# Altium PCB ISO-ASS[3]-VB-RC1.PcbDoc (part 1 of 3)
Units mm, origin at the board's own origin, x right, y up, seen from the top; angles counter-clockwise.
Board outline 300 x 85 mm, 4 copper layers (Top Layer, MidLayer1, MidLayer2, Bottom Layer); 157 components, 49 nets, 745 pads, 270 vias.
Unrouted connection lines stored in the file: 15.
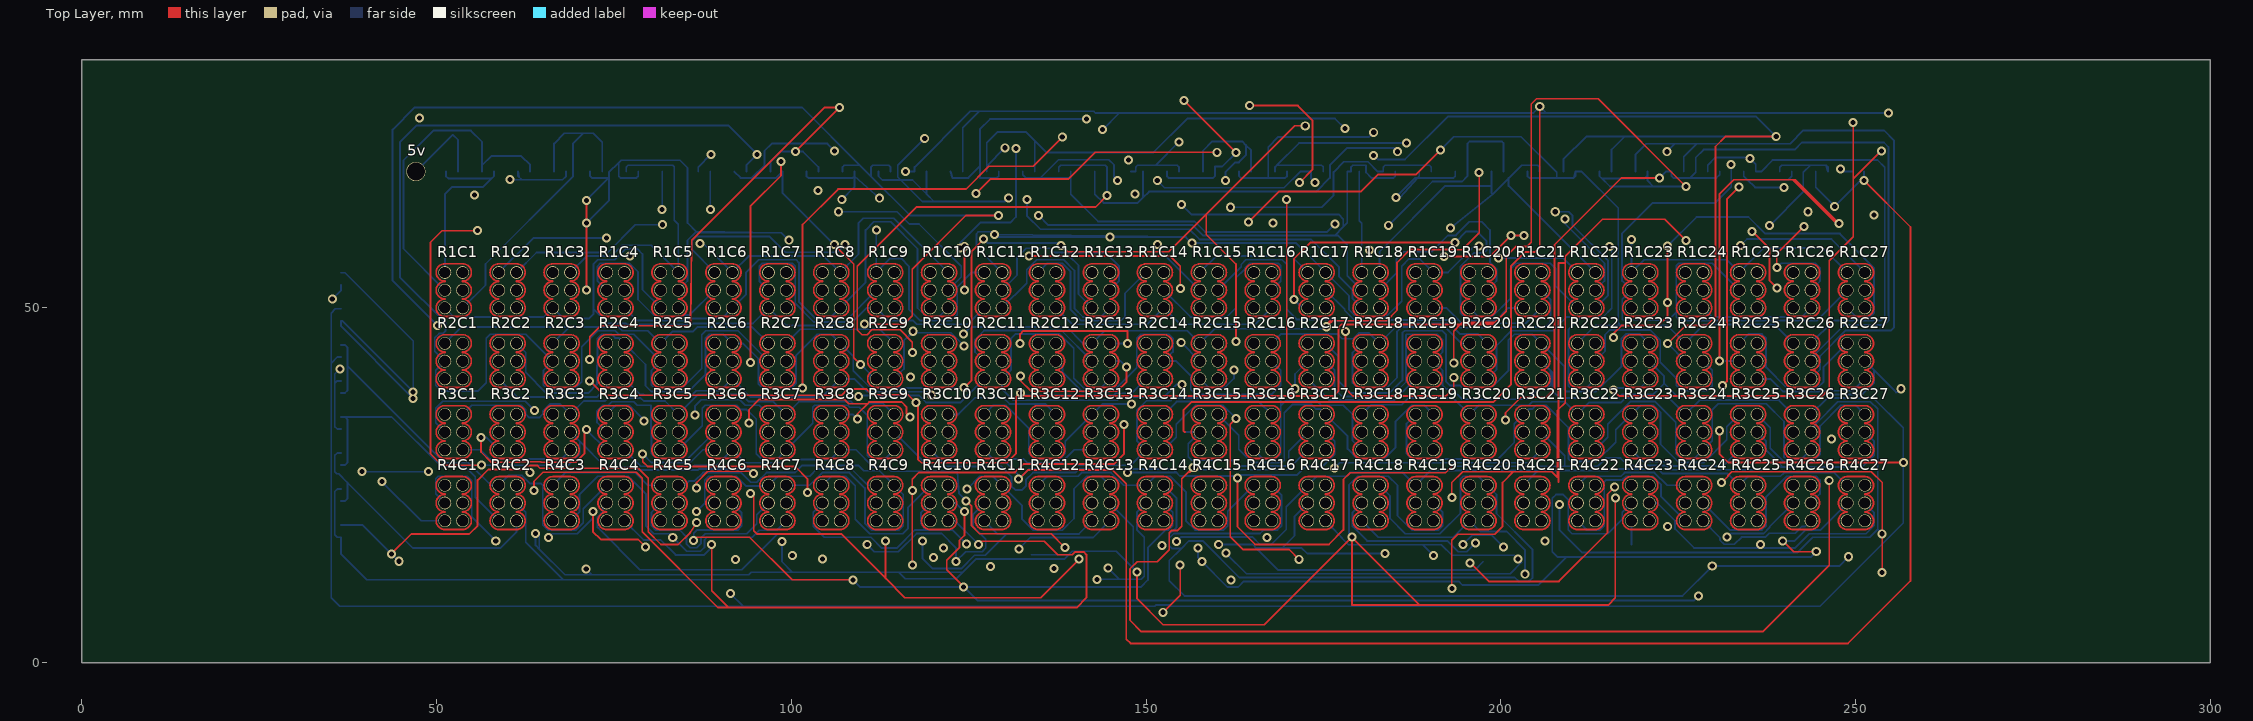
[diagram p0: Top Layer view]
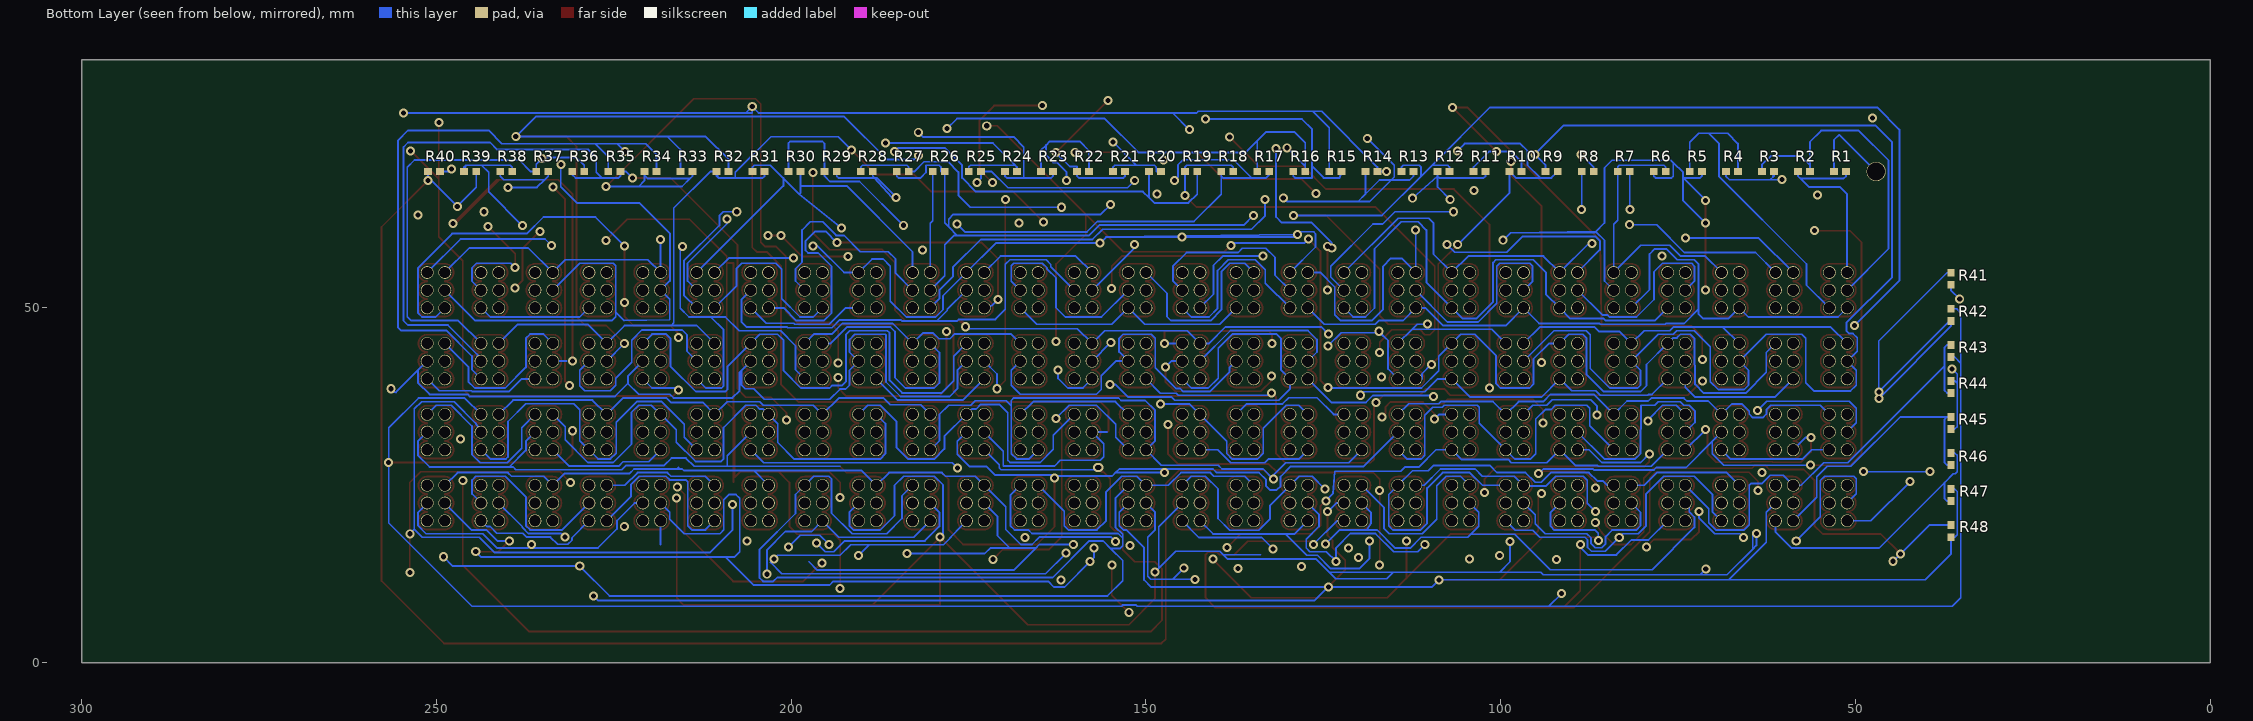
[diagram p1: Bottom Layer view, seen from below]
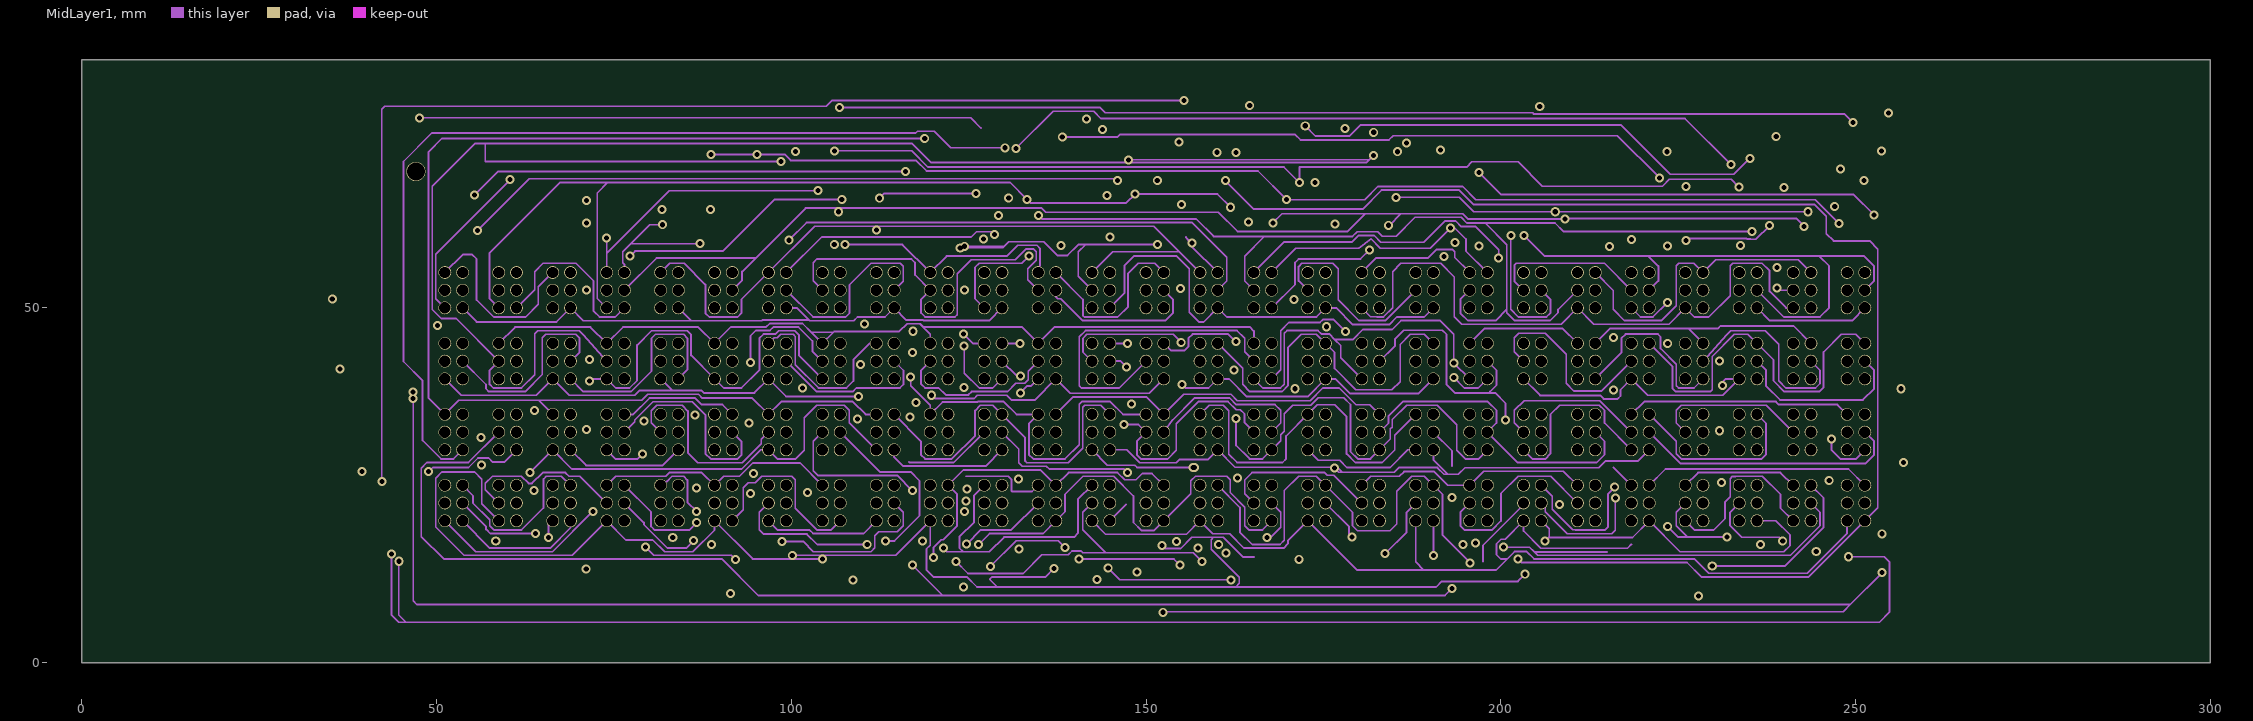
[diagram p2: MidLayer1]
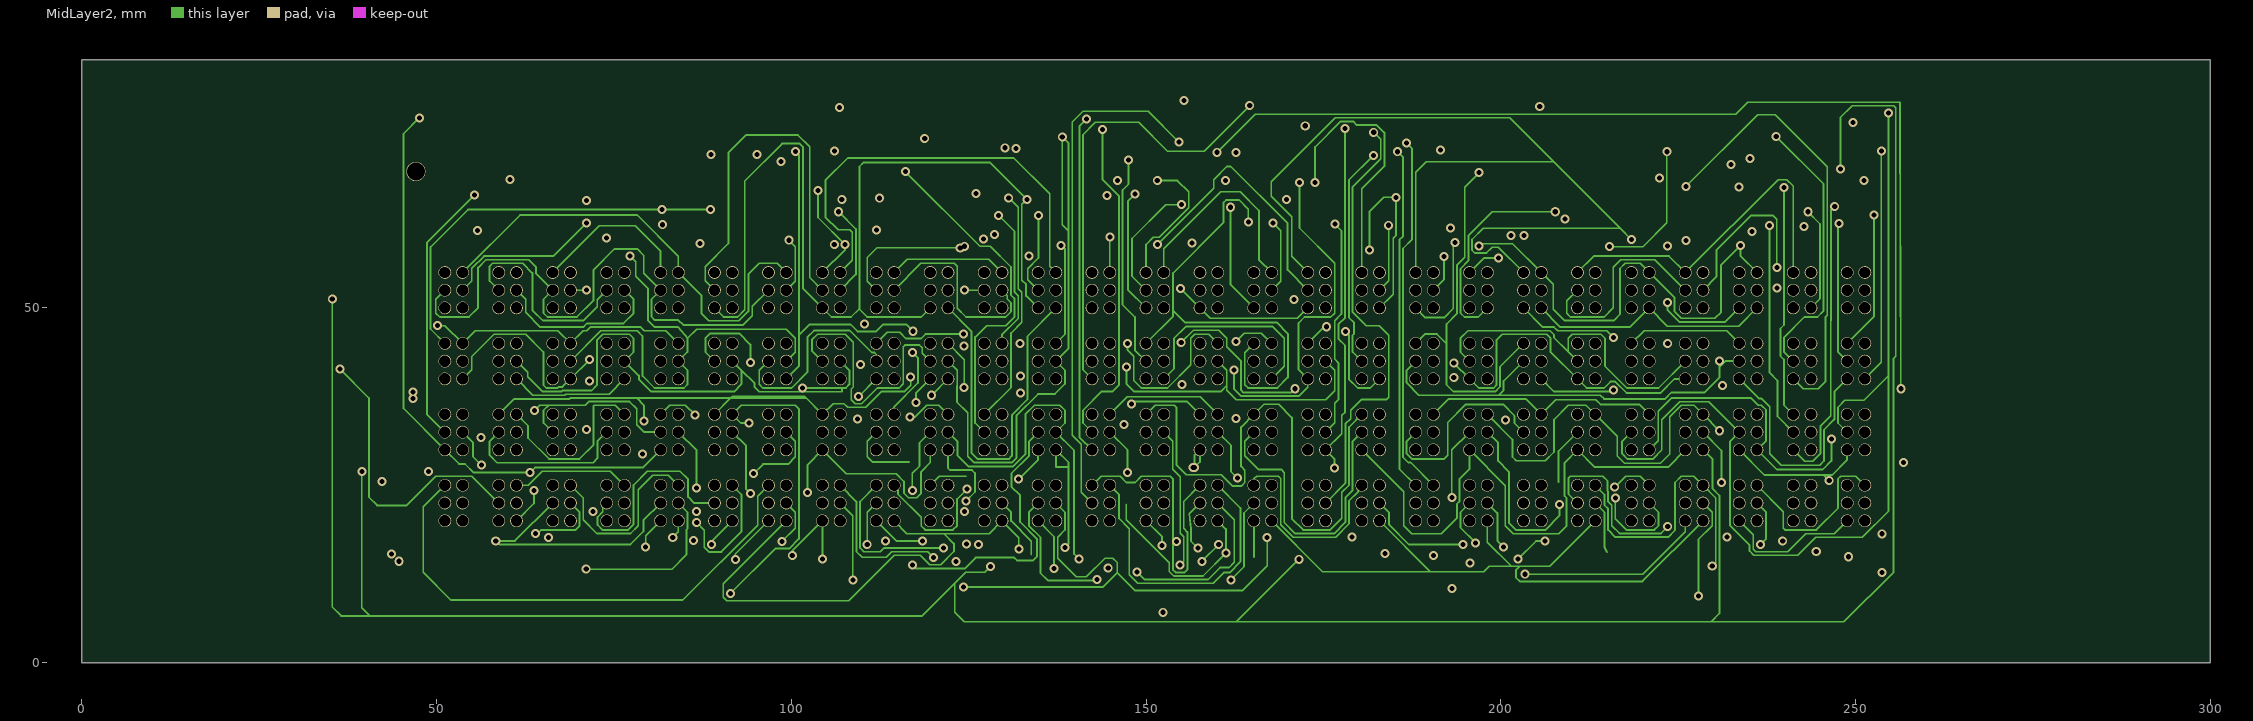
[diagram p3: MidLayer2]

## Layer stack, top to bottom
Top Layer: signal copper 0.0356
Dielectric: prepreg 0.32, FR-4, Dk 4.8
MidLayer1: signal copper 0.0356
Dielectric: core 0.32, FR-4, Dk 4.8
MidLayer2: signal copper 0.0356
Dielectric: prepreg 0.32, FR-4, Dk 4.8
Bottom Layer: signal copper 0.0356

## Board outline
0,0 300,0 300,85 0,85 0,0

## Design rules (kind name [scope] priority, off if disabled: settings)
Clearance [All] p1: gap=0.254
PolygonConnect [All] p1: connectstyle=Relief reliefconductorwidth=0.254 reliefentries=4 polygonreliefangle="90 Angle"
RoutingVias [All] p1: holewidth=0.711 width=1.27 viastyle="Through Hole" minholewidth=0.711 minwidth=1.27 maxholewidth=0.711 maxwidth=1.27
SilkscreenOverComponentPads [All] p1: minsilkscreentomaskgap=0.254
SolderMaskExpansion [All] p1: expansion=0.102
TestPointUsage [All] p1: valid=0 allowmultiple=FALSE
Testpoint [All] p1: side=15 testpointundercomponent=TRUE minsize=1.016 maxsize=2.54 preferedsize=1.524 minholesize=0 maxholesize=1.016 preferedholesize=0.813 testpointgrid=0.025 style=1023 order=0123456789
Width [All] p1: maxlimit=0.254 minlimit=0.254 preferedwidth=0.254
23 further rules are at their usual default settings.

## Components (designator, comment, footprint, x,y, rotation, side; value= is the part's Value field where it differs from the comment)
5v "5v" 5v 47.117,69.215 r180 top
R1 "ERA3Y" ERA-0603 52.197,69.215 r0 bottom
R1C1 "BC-ASS[3]" BC-ASS[3] 51.2,50 r0 top
R1C2 "BC-ASS[3]" BC-ASS[3] 58.8,50 r0 top
R1C3 "BC-ASS[3]" BC-ASS[3] 66.4,50 r0 top
R1C4 "BC-ASS[3]" BC-ASS[3] 74,50 r0 top
R1C5 "BC-ASS[3]" BC-ASS[3] 81.6,50 r0 top
R1C6 "BC-ASS[3]" BC-ASS[3] 89.2,50 r0 top
R1C7 "BC-ASS[3]" BC-ASS[3] 96.8,50 r0 top
R1C8 "BC-ASS[3]" BC-ASS[3] 104.4,50 r0 top
R1C9 "BC-ASS[3]" BC-ASS[3] 112,50 r0 top
R1C10 "BC-ASS[3]" BC-ASS[3] 119.6,50 r0 top
R1C11 "BC-ASS[3]" BC-ASS[3] 127.2,50 r0 top
R1C12 "BC-ASS[3]" BC-ASS[3] 134.8,50 r0 top
R1C13 "BC-ASS[3]" BC-ASS[3] 142.4,50 r0 top
R1C14 "BC-ASS[3]" BC-ASS[3] 150,50 r0 top
R1C15 "BC-ASS[3]" BC-ASS[3] 157.6,50 r0 top
R1C16 "BC-ASS[3]" BC-ASS[3] 165.2,50 r0 top
R1C17 "BC-ASS[3]" BC-ASS[3] 172.8,50 r0 top
R1C18 "BC-ASS[3]" BC-ASS[3] 180.4,50 r0 top
R1C19 "BC-ASS[3]" BC-ASS[3] 188,50 r0 top
R1C20 "BC-ASS[3]" BC-ASS[3] 195.6,50 r0 top
R1C21 "BC-ASS[3]" BC-ASS[3] 203.2,50 r0 top
R1C22 "BC-ASS[3]" BC-ASS[3] 210.8,50 r0 top
R1C23 "BC-ASS[3]" BC-ASS[3] 218.4,50 r0 top
R1C24 "BC-ASS[3]" BC-ASS[3] 226,50 r0 top
R1C25 "BC-ASS[3]" BC-ASS[3] 233.6,50 r0 top
R1C26 "BC-ASS[3]" BC-ASS[3] 241.2,50 r0 top
R1C27 "BC-ASS[3]" BC-ASS[3] 248.8,50 r0 top
R2 "ERA3Y" ERA-0603 57.277,69.215 r180 bottom
R2C1 "BC-ASS[3]" BC-ASS[3] 51.2,40 r0 top
R2C2 "BC-ASS[3]" BC-ASS[3] 58.8,40 r0 top
R2C3 "BC-ASS[3]" BC-ASS[3] 66.4,40 r0 top
R2C4 "BC-ASS[3]" BC-ASS[3] 74,40 r0 top
R2C5 "BC-ASS[3]" BC-ASS[3] 81.6,40 r0 top
R2C6 "BC-ASS[3]" BC-ASS[3] 89.2,40 r0 top
R2C7 "BC-ASS[3]" BC-ASS[3] 96.8,40 r0 top
R2C8 "BC-ASS[3]" BC-ASS[3] 104.4,40 r0 top
R2C9 "BC-ASS[3]" BC-ASS[3] 112,40 r0 top
R2C10 "BC-ASS[3]" BC-ASS[3] 119.6,40 r0 top
R2C11 "BC-ASS[3]" BC-ASS[3] 127.2,40 r0 top
R2C12 "BC-ASS[3]" BC-ASS[3] 134.8,40 r0 top
R2C13 "BC-ASS[3]" BC-ASS[3] 142.4,40 r0 top
R2C14 "BC-ASS[3]" BC-ASS[3] 150,40 r0 top
R2C15 "BC-ASS[3]" BC-ASS[3] 157.6,40 r0 top
R2C16 "BC-ASS[3]" BC-ASS[3] 165.2,40 r0 top
R2C17 "BC-ASS[3]" BC-ASS[3] 172.8,40 r0 top
R2C18 "BC-ASS[3]" BC-ASS[3] 180.4,40 r0 top
R2C19 "BC-ASS[3]" BC-ASS[3] 188,40 r0 top
R2C20 "BC-ASS[3]" BC-ASS[3] 195.6,40 r0 top
R2C21 "BC-ASS[3]" BC-ASS[3] 203.2,40 r0 top
R2C22 "BC-ASS[3]" BC-ASS[3] 210.8,40 r0 top
R2C23 "BC-ASS[3]" BC-ASS[3] 218.4,40 r0 top
R2C24 "BC-ASS[3]" BC-ASS[3] 226,40 r0 top
R2C25 "BC-ASS[3]" BC-ASS[3] 233.6,40 r0 top
R2C26 "BC-ASS[3]" BC-ASS[3] 241.2,40 r0 top
R2C27 "BC-ASS[3]" BC-ASS[3] 248.8,40 r0 top
R3 "ERA3Y" ERA-0603 62.357,69.215 r0 bottom
R3C1 "BC-ASS[3]" BC-ASS[3] 51.2,30 r0 top
R3C2 "BC-ASS[3]" BC-ASS[3] 58.8,30 r0 top
R3C3 "BC-ASS[3]" BC-ASS[3] 66.4,30 r0 top
R3C4 "BC-ASS[3]" BC-ASS[3] 74,30 r0 top
R3C5 "BC-ASS[3]" BC-ASS[3] 81.6,30 r0 top
R3C6 "BC-ASS[3]" BC-ASS[3] 89.2,30 r0 top
R3C7 "BC-ASS[3]" BC-ASS[3] 96.8,30 r0 top
R3C8 "BC-ASS[3]" BC-ASS[3] 104.4,30 r0 top
R3C9 "BC-ASS[3]" BC-ASS[3] 112,30 r0 top
R3C10 "BC-ASS[3]" BC-ASS[3] 119.6,30 r0 top
R3C11 "BC-ASS[3]" BC-ASS[3] 127.2,30 r0 top
R3C12 "BC-ASS[3]" BC-ASS[3] 134.8,30 r0 top
R3C13 "BC-ASS[3]" BC-ASS[3] 142.4,30 r0 top
R3C14 "BC-ASS[3]" BC-ASS[3] 150,30 r0 top
R3C15 "BC-ASS[3]" BC-ASS[3] 157.6,30 r0 top
R3C16 "BC-ASS[3]" BC-ASS[3] 165.2,30 r0 top
R3C17 "BC-ASS[3]" BC-ASS[3] 172.8,30 r0 top
R3C18 "BC-ASS[3]" BC-ASS[3] 180.4,30 r0 top
R3C19 "BC-ASS[3]" BC-ASS[3] 188,30 r0 top
R3C20 "BC-ASS[3]" BC-ASS[3] 195.6,30 r0 top
R3C21 "BC-ASS[3]" BC-ASS[3] 203.2,30 r0 top
R3C22 "BC-ASS[3]" BC-ASS[3] 210.8,30 r0 top
R3C23 "BC-ASS[3]" BC-ASS[3] 218.4,30 r0 top
R3C24 "BC-ASS[3]" BC-ASS[3] 226,30 r0 top
R3C25 "BC-ASS[3]" BC-ASS[3] 233.6,30 r0 top
R3C26 "BC-ASS[3]" BC-ASS[3] 241.2,30 r0 top
R3C27 "BC-ASS[3]" BC-ASS[3] 248.8,30 r0 top
R4 "ERA3Y" ERA-0603 67.437,69.215 r180 bottom
R4C1 "BC-ASS[3]" BC-ASS[3] 51.2,20 r0 top
R4C2 "BC-ASS[3]" BC-ASS[3] 58.8,20 r0 top
R4C3 "BC-ASS[3]" BC-ASS[3] 66.4,20 r0 top
R4C4 "BC-ASS[3]" BC-ASS[3] 74,20 r0 top
R4C5 "BC-ASS[3]" BC-ASS[3] 81.6,20 r0 top
R4C6 "BC-ASS[3]" BC-ASS[3] 89.2,20 r0 top
R4C7 "BC-ASS[3]" BC-ASS[3] 96.8,20 r0 top
R4C8 "BC-ASS[3]" BC-ASS[3] 104.4,20 r0 top
R4C9 "BC-ASS[3]" BC-ASS[3] 112,20 r0 top
R4C10 "BC-ASS[3]" BC-ASS[3] 119.6,20 r0 top
R4C11 "BC-ASS[3]" BC-ASS[3] 127.2,20 r0 top
R4C12 "BC-ASS[3]" BC-ASS[3] 134.8,20 r0 top
R4C13 "BC-ASS[3]" BC-ASS[3] 142.4,20 r0 top
R4C14 "BC-ASS[3]" BC-ASS[3] 150,20 r0 top
R4C15 "BC-ASS[3]" BC-ASS[3] 157.6,20 r0 top
R4C16 "BC-ASS[3]" BC-ASS[3] 165.2,20 r0 top
R4C17 "BC-ASS[3]" BC-ASS[3] 172.8,20 r0 top
R4C18 "BC-ASS[3]" BC-ASS[3] 180.4,20 r0 top
R4C19 "BC-ASS[3]" BC-ASS[3] 188,20 r0 top
R4C20 "BC-ASS[3]" BC-ASS[3] 195.6,20 r0 top
R4C21 "BC-ASS[3]" BC-ASS[3] 203.2,20 r0 top
R4C22 "BC-ASS[3]" BC-ASS[3] 210.8,20 r0 top
R4C23 "BC-ASS[3]" BC-ASS[3] 218.4,20 r0 top
R4C24 "BC-ASS[3]" BC-ASS[3] 226,20 r0 top
R4C25 "BC-ASS[3]" BC-ASS[3] 233.6,20 r0 top
R4C26 "BC-ASS[3]" BC-ASS[3] 241.2,20 r0 top
R4C27 "BC-ASS[3]" BC-ASS[3] 248.8,20 r0 top
R5 "ERA3Y" ERA-0603 72.517,69.215 r0 bottom
R6 "ERA3Y" ERA-0603 77.597,69.215 r180 bottom
R7 "ERA3Y" ERA-0603 82.677,69.215 r0 bottom
R8 "ERA3Y" ERA-0603 87.757,69.215 r180 bottom
R9 "ERA3Y" ERA-0603 92.837,69.215 r0 bottom
R10 "ERA3Y" ERA-0603 97.917,69.215 r180 bottom
R11 "ERA3Y" ERA-0603 102.997,69.215 r0 bottom
R12 "ERA3Y" ERA-0603 108.077,69.215 r180 bottom
R13 "ERA3Y" ERA-0603 113.157,69.215 r0 bottom
R14 "ERA3Y" ERA-0603 118.237,69.215 r180 bottom
R15 "ERA3Y" ERA-0603 123.317,69.215 r0 bottom
R16 "ERA3Y" ERA-0603 128.397,69.215 r180 bottom
R17 "ERA3Y" ERA-0603 133.477,69.215 r0 bottom
R18 "ERA3Y" ERA-0603 138.557,69.215 r180 bottom
R19 "ERA3Y" ERA-0603 143.637,69.215 r0 bottom
R20 "ERA3Y" ERA-0603 148.717,69.215 r180 bottom
R21 "ERA3Y" ERA-0603 153.797,69.215 r0 bottom
R22 "ERA3Y" ERA-0603 158.877,69.215 r180 bottom
R23 "ERA3Y" ERA-0603 163.957,69.215 r0 bottom
R24 "ERA3Y" ERA-0603 169.037,69.215 r180 bottom
R25 "ERA3Y" ERA-0603 174.117,69.215 r0 bottom
R26 "ERA3Y" ERA-0603 179.197,69.215 r180 bottom
R27 "ERA3Y" ERA-0603 184.277,69.215 r0 bottom
R28 "ERA3Y" ERA-0603 189.357,69.215 r0 bottom
R29 "ERA3Y" ERA-0603 194.437,69.215 r180 bottom
R30 "ERA3Y" ERA-0603 199.517,69.215 r0 bottom
R31 "ERA3Y" ERA-0603 204.597,69.215 r0 bottom
R32 "ERA3Y" ERA-0603 209.677,69.215 r0 bottom
R33 "ERA3Y" ERA-0603 214.757,69.215 r0 bottom
R34 "ERA3Y" ERA-0603 219.837,69.215 r0 bottom
R35 "ERA3Y" ERA-0603 224.917,69.215 r0 bottom
R36 "ERA3Y" ERA-0603 229.997,69.215 r0 bottom
R37 "ERA3Y" ERA-0603 235.077,69.215 r0 bottom
R38 "ERA3Y" ERA-0603 240.157,69.215 r0 bottom
R39 "ERA3Y" ERA-0603 245.237,69.215 r0 bottom
R40 "ERA3Y" ERA-0603 250.317,69.215 r0 bottom
R41 "ERA3Y" ERA-0603 36.576,54.102 r270 bottom
R42 "ERA3Y" ERA-0603 36.576,49.022 r270 bottom
R43 "ERA3Y" ERA-0603 36.576,43.942 r270 bottom
R44 "ERA3Y" ERA-0603 36.576,38.862 r270 bottom
R45 "ERA3Y" ERA-0603 36.576,33.782 r270 bottom
R46 "ERA3Y" ERA-0603 36.576,28.702 r270 bottom
R47 "ERA3Y" ERA-0603 36.576,23.622 r270 bottom
R48 "ERA3Y" ERA-0603 36.576,18.542 r270 bottom

## Footprints (in the part's own frame and the unit in brackets; to place one, negate y for a bottom-side part, rotate by r counter-clockwise, add the part's x,y. Pads: shape width x height; smd on the part's side, far side on the other; paste and mask are expansions set on the pad)
5v [mm]
  round 2.7 hole 2.5: 0(0,0)
BC-ASS[3] [mm] "American Standard Sign [3]"
  round 1.8 hole 1.6: 1(0,5) 2(0,2.5) 3(0,0) 4(2.5,5) 5(2.5,2.5) 6(2.5,0)
  Top Layer lines w0.254: 0,1.223 ccw(c0,0) 0,-1.223 2.5,-1.223 ccw(c2.5,0) 2.5,1.223 ; 0,1.277 cw(c0,2.5) 0,3.723 ; 0,3.777 cw(c0,5) 0,6.223 2.5,6.223 cw(c2.5,5) 2.5,3.777 ; 2.5,1.277 ccw(c2.5,2.5) 2.5,3.723
ERA-0603 [mm] "Chip Resistor; Body 1.6 x 0.8 mm (LxW typ)"
  rect 1.1x1 smd: 1(-0.85,0) 2(0.85,0)

## Part data
R1 R2 R3 R4 R5 R6 R7 R8 R9 R10 R11 R12 R13 R14 R15 R16 R17 R18 R19 R20 R21 R22 R23 R24 R25 R26 R27 R28 R29 R30 R31 R32 R33 R34 R35 R36 R37 R38 R39 R40 R41 R42 R43 R44 R45 R46 R47 R48: "Rectangular Thick Film Chip Resistor, 10 Ohm to 330k Ohm Range, 0.1% and 0.5% Tolerance, 0603 Size, 0.063 W"

## Via types
v1: diameter 1.27, hole 0.711, Top Layer to Bottom Layer, 270 vias

## Nets (pads, with @x,y where several pads share a name; then routed paths per layer and width w, separated by ;. In a path a pad name is that pad's centre, name@x,y a point inside that pad or via, vN(x,y) a via of type N, cw(c..) or ccw(c..) an arc to the next point about the centre after c; other vN are vias at no path point)
Net5v_0: 5v.0 R1.2 | length 12.9
  Bottom Layer w0.254: 5v.0@47.117,69.215 52.312,74.41 52.324,74.41 53.047,73.687 R1.2@53.047,69.215
NetR1_1: R1.1 R1C1.1 R1C3.1 R1C5.1 R1C7.1 R1C9.1 R1C11.1 R1C13.1 R1C15.1 R1C17.1 R1C19.1 R1C21.1 R1C23.1 R1C25.1 R1C27.1 R2.1 | length 468
  MidLayer1 w0.254: R1C1.1@51.2,55 53.706,57.506 55.067,57.506 55.677,56.896 55.677,51.118 58.078,48.717 62.586,48.717 64.364,50.495 64.364,52.964 R1C3.1@66.4,55 ; R1C5.1@81.6,55 82.886,56.286 84.912,56.286 87.909,53.289 87.909,49.276 88.468,48.717 92.456,48.717 92.989,49.251 92.989,51.189 R1C7.1@96.8,55 103.319,61.519 112,61.519 112.508,61.519 ; v1(112,61.011) 112.508,61.519 ; R1C13.1@142.4,55 145.312,57.912 154.688,57.912 ; R1C15.1@157.6,55 154.688,57.912 ; 112.508,61.519 151.081,61.519 ; 112.508,61.519 151.081,61.519 ; 151.081,61.519 154.688,57.912
  MidLayer2 w0.254: R1C3.1@66.4,55 72.97,61.57 78.029,61.57 81.6,57.998 R1C5.1@81.6,55 ; R1C17.1@172.8,55 170.545,57.255 170.545,62.83 167.64,65.735 167.64,67.767 176.657,76.784 201.255,76.784 207.453,70.587 ; R1C19.1@188,55 188,59.095 188.011,59.106 188.011,69.099 189.499,70.587 207.453,70.587 ; R1C21.1@203.2,55 199.653,58.547 198.78,58.547 197.968,57.734 196.342,57.734 195.936,58.141 195.936,59.639 197.51,61.214 216.825,61.214 ; v1(218.4,59.639) 216.825,61.214 ; 207.453,70.587 216.825,61.214 ; 207.453,70.587 216.825,61.214
  Bottom Layer w0.254: R1C1.1@51.2,55 51.2,66.04 52.216,67.056 56.603,67.056 57.797,68.25 ; R1.1@51.347,69.215 51.347,68.566 51.664,68.25 57.797,68.25 ; R2.1@58.127,69.215 58.127,68.58 ; v1(112,61.011) R1C9.1@112,55 113.972,56.972 115.494,56.972 116.586,55.88 116.586,49.837 118.212,48.211 122.582,48.211 123.393,49.022 123.393,52.946 125.447,55 R1C11.1@127.2,55 ; R1C15.1@157.6,55 159.897,57.297 170.503,57.297 R1C17.1@172.8,55 ; v1(218.4,59.639) R1C23.1@218.4,55 220.19,56.791 231.809,56.791 R1C25.1@233.6,55 237.045,58.445 245.355,58.445 R1C27.1@248.8,55 ; 57.797,68.25 58.127,68.58 ; 57.797,68.25 58.127,68.58
NetR1C1_2: R1C1.2 R1C3.2 R1C5.2 R1C7.2 R1C9.2 R1C11.2 R1C13.2 R1C15.2 R1C17.2 R1C19.2 R1C21.2 R1C23.2 R1C25.2 R1C27.2 R2.2 R3.2 | length 558.6
  Top Layer w0.254: v1(124.409,52.5) 124.409,58.471 v1(124.409,58.688)
  MidLayer1 w0.254: v1(123.825,58.471) 124.409,58.471 129.825,58.471 130.043,58.688 ; v1(124.409,58.688) 130.043,58.688 ; v1(131.674,72.466) 136.931,77.724 142.621,77.724 143.662,76.683 225.958,76.683 v1(232.461,70.18) ; R1C13.2@142.4,52.5 140.462,54.438 140.462,57.912 141.478,58.928 ; R1C17.2@172.8,52.5 171.501,53.799 171.501,55.829 171.958,56.286 176.327,56.286 177.089,55.524 177.089,51.13 180.01,48.209 183.709,48.209 R1C19.2@188,52.5 ; R1C21.2@203.2,52.5 201.919,53.781 201.919,56.021 202.184,56.286 214.614,56.286 R1C23.2@218.4,52.5 ; 130.043,58.688 130.689,59.334 ; 130.043,58.688 130.689,59.334 ; 130.689,59.334 135.566,59.334 137.496,57.404 138.938,57.404 140.462,58.928 141.478,58.928 ; 141.478,58.928 v1(151.613,58.928) 141.478,58.928
  MidLayer2 w0.254: R1C1.2@51.2,52.5 49.919,51.219 49.919,49.276 50.478,48.717 54.585,48.717 55.88,50.013 55.88,55.677 56.998,56.794 62.992,56.794 64.059,55.728 64.059,54.841 R1C3.2@66.4,52.5 65.1,51.2 65.1,49.276 65.657,48.719 69.801,48.719 72.161,51.079 72.161,55.372 75.108,58.318 78.3,58.318 79.236,57.382 79.236,54.864 R1C5.2@81.6,52.5 80.315,51.215 80.315,48.768 80.796,48.287 84.095,48.287 84.778,47.604 93.247,47.604 94.526,48.882 94.526,50.226 R1C7.2@96.8,52.5 ; R1C9.2@112,52.5 110.719,53.781 110.719,57.099 112.09,58.471 v1(123.825,58.471) ; v1(124.409,52.5) R1C11.2@127.2,52.5 ; v1(151.613,58.928) 159.537,66.853 159.537,68.072 161.392,69.926 161.95,69.926 169.951,61.925 169.951,55.349 R1C17.2@172.8,52.5
  Bottom Layer w0.254: R1C1.2@51.2,52.5 45.364,58.336 45.364,70.79 49.555,74.981 54.864,74.981 56.427,73.418 56.427,70.104 ; R3.2@63.207,69.215 63.207,70.168 61.976,71.399 57.722,71.399 56.427,70.104 ; R1C7.2@96.8,52.5 95.519,53.781 95.519,55.88 95.92,56.281 100.18,56.281 100.581,55.88 100.581,50.647 103.209,48.02 107.52,48.02 R1C9.2@112,52.5 ; v1(123.825,58.471) 123.825,58.688 123.825,59.196 126.655,62.027 130.886,62.027 131.674,62.814 v1(131.674,72.466) ; v1(151.613,58.928) 151.613,58.487 R1C15.2@157.6,52.5 ; v1(232.461,70.18) 232.461,67.056 230.175,64.77 221.336,64.77 217.094,60.528 217.094,53.806 R1C23.2@218.4,52.5 217.119,51.219 217.119,48.336 223.52,48.209 224.714,49.403 ; R1C25.2@233.6,52.5 229.819,56.281 225.044,56.281 224.714,55.951 ; R1C27.2@248.8,52.5 244.509,48.209 225.273,48.209 224.714,48.768 224.714,49.403 ; 56.427,70.104 R2.2@56.427,69.215 56.427,70.104 ; 224.714,49.403 224.714,55.951 ; 224.714,49.403 224.714,55.951
NetR1C1_3: R1C1.3 R1C3.3 R1C5.3 R1C7.3 R1C9.3 R1C11.3 R1C13.3 R1C15.3 R1C17.3 R1C19.3 R1C21.3 R1C23.3 R1C25.3 R1C27.3 R3.1 R4.1 | length 409.1
  Top Layer w0.254: v1(133.528,57.302) 153.416,57.302 154.838,55.88 v1(154.838,52.762) ; v1(170.84,51.206) 170.84,56.896 173.152,59.207 v1(193.573,59.207) ; v1(215.849,45.847) 215.849,46.355 217.018,47.523 222.225,47.523 223.469,48.768 v1(223.469,50.749) ; v1(223.469,50.749) v1(223.469,58.699) v1(223.469,50.749)
  MidLayer1 w0.254: R1C1.3@51.2,50 49.919,51.281 49.919,57.59 v1(60.401,68.072) ; R1C11.3@127.2,50 125.908,51.292 125.908,55.702 126.492,56.286 132.512,56.286 v1(133.528,57.302) ; R1C23.3@218.4,50 219.683,48.717 221.437,48.717 v1(223.469,50.749)
  MidLayer2 w0.254: v1(154.838,52.762) R1C15.3@157.6,50 159.061,48.539 171.339,48.539 R1C17.3@172.8,50 ; R1C19.3@188,50 189.359,48.641 192.024,48.641 193.303,49.92 193.303,58.937 v1(193.573,59.207) ; R1C21.3@203.2,50 205.903,47.297 207.489,47.297 207.997,46.789 214.907,46.789 v1(215.849,45.847) ; v1(223.469,50.749) 223.469,49.718 225.156,48.031 231.631,48.031 R1C25.3@233.6,50
  Bottom Layer w0.254: R1C1.3@51.2,50 52.483,48.717 65.117,48.717 R1C3.3@66.4,50 67.886,48.514 71.526,48.514 72.161,49.149 72.161,49.784 ; v1(60.401,68.072) 62.015,68.072 ; R4.1@68.287,69.215 68.287,68.58 67.779,68.072 ; R1C5.3@81.6,50 79.045,52.555 79.045,57.582 78.308,58.318 76.674,58.318 75.145,56.789 72.719,56.789 72.161,56.231 ; R1C11.3@127.2,50 124.903,47.703 117.704,47.703 117.196,48.211 113.789,48.211 R1C9.3@112,50 110.63,50 108.142,47.512 99.288,47.512 R1C7.3@96.8,50 94.605,47.805 86.103,47.805 86.001,47.703 76.815,47.703 76.713,47.805 74.14,47.805 72.161,49.784 ; v1(133.528,57.302) 139.192,57.302 140.483,56.011 140.483,51.917 R1C13.3@142.4,50 ; v1(170.84,51.206) 171.691,50.356 R1C17.3@172.8,50 ; v1(193.573,59.207) 195.148,60.782 196.621,60.782 197.968,59.436 197.968,58.09 197.612,57.734 196.173,57.734 194.319,55.88 194.319,49.276 195.384,48.211 199.285,48.211 201.074,50 R1C21.3@203.2,50 ; v1(223.469,58.699) 227.584,62.814 234.899,62.814 237.236,60.477 247.777,60.477 252.581,55.673 252.581,49.276 252.024,48.719 250.081,48.719 R1C27.3@248.8,50 ; 61.64,68.447 R3.1@61.507,69.215 61.507,68.58 61.64,68.447 ; 61.64,68.447 62.015,68.072 ; 61.64,68.447 62.015,68.072 ; 62.015,68.072 67.779,68.072 ; 62.015,68.072 67.779,68.072 ; 72.161,49.784 72.161,56.231 ; 72.161,49.784 72.161,56.231
NetR1C1_4: R1C1.4 R1C3.4 R1C5.4 R1C7.4 R1C9.4 R1C11.4 R1C13.4 R1C15.4 R1C17.4 R1C19.4 R1C21.4 R1C23.4 R1C25.4 R1C27.4 R6.2 R7.2 | length 386.1
  MidLayer1 w0.254: R1C7.4@99.3,55 104.295,59.995 125.38,59.995 126.117,60.731 128.255,60.731 v1(128.633,60.354) ; R1C15.4@160.1,55 v1@156.476,58.624 ; v1@156.476,58.624 156.248,58.988 155.62,59.987 v1(156.476,59.131) v1@156.476,58.624
  MidLayer2 w0.254: R1C1.4@53.7,55 61.794,63.094 78.283,63.094 84.1,57.276 R1C5.4@84.1,55 87.376,51.724 87.376,49.2 88.392,48.184 92.639,48.184 93.965,49.51 93.965,54.748 95.504,56.286 98.014,56.286 R1C7.4@99.3,55 ; R1C9.4@114.5,55 116.345,56.845 127.855,56.845 R1C11.4@129.7,55 ; R1C13.4@144.9,55 v1(144.9,59.987) ; v1(196.952,58.75) 197.256,59.055 201.645,59.055 R1C21.4@205.7,55 207.391,53.309 207.391,49.809 208.991,48.209 215.891,48.209 216.789,49.107 216.789,55.55 217.52,56.281 219.619,56.281 R1C23.4@220.9,55 224.485,51.415 224.485,49.45 225.396,48.539 230.175,48.539 231.038,49.403 231.038,56.058 v1(233.756,58.776) 233.756,57.344 R1C25.4@236.1,55
  Bottom Layer w0.254: R1C3.4@68.9,55 71.197,57.297 74.637,57.297 76.166,58.826 80.274,58.826 R1C5.4@84.1,55 84.1,61.798 83.527,62.371 R7.2@83.527,69.215 83.527,69.864 83.287,70.104 77.001,70.104 76.747,69.85 R6.2@76.747,69.215 ; R1C11.4@129.7,55 126.111,58.589 126.111,60.452 126.39,60.731 128.255,60.731 v1(128.633,60.354) ; v1(196.952,58.75) 196.307,58.75 192.557,55 R1C19.4@190.5,55 188.604,56.896 187.046,56.896 186.03,55.88 186.03,50.948 183.799,48.717 179.654,48.717 178.611,49.76 178.611,51.689 R1C17.4@175.3,55 171.169,59.131 v1(156.476,59.131) 155.62,59.987 ; v1(233.756,58.776) 234.696,59.715 246.585,59.715 R1C27.4@251.3,55 ; v1(128.633,60.354) 129,59.987 v1(144.9,59.987) ; v1(128.633,60.354) 144.902,60.133 155.62,59.987 ; v1(144.9,59.987) 155.62,59.987 ; v1(144.9,59.987) 155.62,59.987
NetR1C1_5: R1C1.5 R1C3.5 R1C5.5 R1C7.5 R1C9.5 R1C11.5 R1C13.5 R1C15.5 R1C17.5 R1C19.5 R1C21.5 R1C23.5 R1C25.5 R1C27.5 R5.1 R6.1 | length 522
  Top Layer w0.254: v1(71.145,52.5) v1(71.145,61.951) v1(71.145,65.151) ; v1(191.973,57.226) 198.439,57.226 v1(201.411,60.198) v1(203.276,60.198)
  MidLayer1 w0.254: R1C7.5@99.3,52.5 103.081,48.719 107.698,48.719 108.221,49.242 108.221,53.255 111.247,56.281 115.38,56.281 115.781,55.88 115.781,53.781 R1C9.5@114.5,52.5 ; v1(99.67,59.538) 102.159,62.027 156.515,62.027 161.392,57.15 161.392,53.792 R1C15.5@160.1,52.5 ; v1(201.411,60.198) 201.411,49.784 202.476,48.719 206.424,48.719 206.981,49.276 206.981,51.219 R1C21.5@205.7,52.5 ; v1(203.276,60.198) 206.177,57.297 ; R1C23.5@220.9,52.5 222.199,53.799 222.199,55.885 220.787,57.297 ; R1C25.5@236.1,52.5 239.881,48.719 244.959,48.719 246.253,50.013 246.253,55.905 244.861,57.297 ; R1C27.5@251.3,52.5 252.603,53.803 252.603,55.88 251.186,57.297 244.861,57.297 ; 206.177,57.297 220.787,57.297 ; 206.177,57.297 220.787,57.297 ; 206.177,57.297 220.787,57.297 ; 220.787,57.297 244.861,57.297 ; 220.787,57.297 244.861,57.297
  MidLayer2 w0.254: R1C1.5@53.7,52.5 54.991,53.791 54.991,55.567 56.727,57.302 66.497,57.302 v1(71.145,61.951) ; R1C3.5@68.9,52.5 v1(71.145,52.5) ; R1C7.5@99.3,52.5 100.581,53.781 100.581,58.626 v1(99.67,59.538) ; R1C9.5@114.5,52.5 118.286,56.286 122.987,56.286 123.393,55.88 123.393,49.962 124.638,48.717 130.229,48.717 130.981,49.469 130.981,50.731 130.454,51.257 130.454,51.746 R1C11.5@129.7,52.5 ; R1C19.5@190.5,52.5 191.973,53.973 v1(191.973,57.226)
  Bottom Layer w0.254: v1(71.145,61.951) 74.32,65.126 74.32,68.326 ; v1(71.145,65.151) 74.32,68.326 ; R5.1@71.667,69.215 71.667,68.58 71.921,68.326 74.32,68.326 ; R6.1@78.447,69.215 78.447,68.58 78.193,68.326 75.946,68.326 75.692,68.58 75.692,70.46 ; R1C5.5@84.1,52.5 85.395,53.795 85.395,59.519 86.623,60.748 ; v1(99.67,59.538) 98.628,60.579 ; R1C11.5@129.7,52.5 131.826,54.626 131.826,57.125 133.096,58.395 136.423,58.395 137.008,57.81 144.272,57.81 146.202,55.88 146.202,53.802 R1C13.5@144.9,52.5 ; R1C15.5@160.1,52.5 163.411,55.811 163.411,56.116 164.084,56.789 169.164,56.789 169.824,56.129 169.824,49.784 171.221,48.387 176.375,48.387 176.606,48.156 179.481,48.156 ; R1C17.5@175.3,52.5 178.001,49.799 178.001,49.636 179.481,48.156 ; R1C21.5@205.7,52.5 206.985,51.215 206.985,48.006 206.276,47.297 200.572,47.297 200.469,47.195 194.248,47.195 193.13,48.313 184.568,48.313 184.41,48.156 ; 74.32,68.326 74.32,69.088 ; 74.32,68.326 74.32,69.088 ; 74.32,69.088 75.692,70.46 ; 75.692,70.46 76.048,70.815 ; 75.692,70.46 76.048,70.815 ; 76.048,70.815 84.328,70.815 85.395,69.748 85.395,61.976 86.623,60.748 ; 86.623,60.748 86.792,60.579 98.628,60.579 ; 86.623,60.748 98.628,60.579 ; 179.481,48.156 184.41,48.156 ; 179.481,48.156 184.41,48.156
NetR1C1_6: R1C1.6 R1C3.6 R1C5.6 R1C7.6 R1C9.6 R1C11.6 R1C13.6 R1C15.6 R1C17.6 R1C19.6 R1C21.6 R1C23.6 R1C25.6 R1C27.6 R4.2 R5.2 | length 303.2
  MidLayer1 w0.254: R1C1.6@53.7,50 55.669,48.031 66.931,48.031 R1C3.6@68.9,50 70.716,48.184 85.916,48.184 ; R1C5.6@84.1,50 85.916,48.184 ; R1C7.6@99.3,50 100.797,50 102.484,48.313 ; R1C11.6@129.7,50 127.911,48.211 118.667,48.211 118.593,48.285 116.215,48.285 R1C9.6@114.5,50 113.217,48.717 109.347,48.717 108.814,48.184 102.613,48.184 ; R1C13.6@144.9,50 146.964,52.064 146.964,55.956 148.336,57.328 154.28,57.328 156.083,55.524 156.083,49.403 157.48,48.006 158.106,48.006 R1C15.6@160.1,50 161.383,48.717 174.017,48.717 R1C17.6@175.3,50 176.797,50 179.146,47.65 184.261,47.65 185.327,48.717 189.217,48.717 R1C19.6@190.5,50 ; R1C25.6@236.1,50 237.891,48.209 249.509,48.209 R1C27.6@251.3,50 ; 85.916,48.184 95.858,48.184 ; 85.916,48.184 95.858,48.184 ; 95.858,48.184 95.987,48.313 102.484,48.313 ; 102.484,48.313 102.613,48.184 ; 102.484,48.313 102.613,48.184
  MidLayer2 w0.254: R1C21.6@205.7,50 208.403,47.297 218.197,47.297 R1C23.6@220.9,50 223.478,47.422 233.522,47.422 R1C25.6@236.1,50
  Bottom Layer w0.254: R1C1.6@53.7,50 56.921,53.221 56.921,56.185 69.24,68.504 69.24,73.152 70.688,74.6 ; R4.2@66.587,69.215 66.587,73.152 68.035,74.6 70.688,74.6 ; R5.2@73.367,69.215 73.367,73.369 72.136,74.6 ; R1C11.6@129.7,50 133.198,53.498 133.198,55.372 134.62,56.794 138.386,56.794 139.903,55.278 139.903,49.938 141.122,48.719 143.619,48.719 R1C13.6@144.9,50 ; R1C19.6@190.5,50 192.332,50 194.629,47.703 199.519,47.703 199.644,47.828 203.528,47.828 R1C21.6@205.7,50 ; 70.688,74.6 72.136,74.6 ; 70.688,74.6 72.136,74.6
NetR1C2_1: R1C2.1 R1C4.1 R1C6.1 R1C8.1 R1C10.1 R1C12.1 R1C14.1 R1C16.1 R1C18.1 R1C20.1 R1C22.1 R1C24.1 R1C26.1 R25.1 R26.1 | length 386
  MidLayer1 w0.254: v1(74,59.842) 74,57.706 ; v1(103.784,66.523) 82.817,66.523 74,57.706 ; v1(107.594,58.928) 115.672,58.928 R1C10.1@119.6,55 121.902,57.302 130.383,57.302 131.907,58.826 134.645,58.826 135.052,58.42 135.052,56.03 R1C12.1@134.8,55 ; R1C16.1@165.2,55 169.509,59.309 179.07,59.309 179.984,60.223 182.131,60.223 183.096,59.258 189.154,59.258 192.151,62.255 193.617,62.255 194.417,61.455 196.457,61.455 199.695,58.217 v1(199.695,57.023) ; R1C18.1@180.4,55 182.448,57.048 189.763,57.048 190.957,58.242 193.167,58.242 193.497,57.912 193.497,57.103 R1C20.1@195.6,55 ; 74,57.706 R1C4.1@74,55 74,57.706
  MidLayer2 w0.254: v1(103.784,66.523) 103.784,62.738 v1(107.594,58.928) 107.594,58.194 R1C8.1@104.4,55 ; R1C14.1@150,55 150,58.928 151.016,59.944 151.867,59.944 156.032,64.11 156.032,66.345 154.432,67.945 v1(151.587,67.945) ; v1(173.812,67.691) 173.812,72.669 177.419,76.276 179.197,76.276 179.705,75.768 182.524,75.768 183.591,74.701 183.591,69.977 180.4,66.786 R1C18.1@180.4,55 ; R1C20.1@195.6,55 197.623,57.023 v1(199.695,57.023) ; R1C22.1@210.8,55 213.097,57.297 223.703,57.297 R1C24.1@226,55 239.072,68.072 240.311,68.072 241.2,67.183 R1C26.1@241.2,55
  Bottom Layer w0.254: R1C2.1@58.8,55 63.642,59.842 v1(74,59.842) ; R1C6.1@89.2,55 86.03,58.17 86.03,59.436 86.665,60.071 96.926,60.071 99.162,57.836 106.502,57.836 v1(107.594,58.928) ; R1C12.1@134.8,55 136.086,56.286 138.176,56.286 139.379,55.084 139.379,49.736 140.903,48.211 146.48,48.211 147.037,48.768 147.037,52.037 R1C14.1@150,55 ; v1(151.587,67.945) 152.603,66.929 169.443,66.929 171.729,69.215 R25.1@173.267,69.215 173.267,68.236 v1(173.812,67.691) ; R26.1@180.047,69.215 180.047,62.278 180.4,61.925 R1C18.1@180.4,55 ; v1(199.695,57.023) 208.777,57.023 R1C22.1@210.8,55
NetR1C2_2: R1C2.2 R1C4.2 R1C6.2 R1C8.2 R1C10.2 R1C12.2 R1C14.2 R1C16.2 R1C18.2 R1C20.2 R1C22.2 R1C24.2 R1C26.2 R26.2 R27.2 | length 539.9
  Top Layer w0.254: v1(235.407,60.782) 237.871,58.318 237.871,53.848 v1(238.887,52.832)
  MidLayer1 w0.254: R1C8.2@104.4,52.5 103.099,53.801 103.099,56.388 103.607,56.896 116.942,56.896 117.45,56.388 117.45,54.65 R1C10.2@119.6,52.5 118.313,51.213 118.313,49.278 118.872,48.719 123.09,48.719 123.393,49.022 123.393,54.788 125.4,56.794 131.572,56.794 133.096,58.318 134.137,58.318 134.544,57.912 134.544,56.718 133.325,55.499 133.325,53.975 R1C12.2@134.8,52.5 ; v1(134.849,63.043) 135.357,62.535 157.068,62.535 159.532,60.071 166.7,60.071 ; R1C16.2@165.2,52.5 163.906,53.794 163.906,57.277 166.7,60.071 ; R1C20.2@195.6,52.5 194.31,51.21 194.31,49.276 195.375,48.211 199.265,48.211 200.838,49.784 ; R1C22.2@210.8,52.5 208.062,49.762 208.062,49.341 206.932,48.211 201.968,48.211 200.838,49.341 200.838,49.784 ; v1(235.407,60.782) 208.813,60.782 207.633,61.963 ; v1(238.887,52.832) 239.219,52.5 R1C26.2@241.2,52.5 ; 166.7,60.071 179.095,60.071 ; 166.7,60.071 179.095,60.071 ; 179.095,60.071 179.756,60.731 182.639,60.731 183.262,60.108 185.254,60.108 187.909,62.763 194.412,62.763 195.212,61.963 197.803,61.963 ; 197.803,61.963 200.838,58.928 ; 197.803,61.963 207.633,61.963 ; 197.803,61.963 207.633,61.963 ; 200.838,49.784 200.838,58.928 ; 200.838,49.784 200.838,58.928
  MidLayer2 w0.254: R1C2.2@58.8,52.5 57.506,53.794 57.506,55.88 57.912,56.286 62.154,56.286 63.535,54.905 63.535,49.698 65.024,48.209 70.689,48.209 72.669,50.189 72.669,51.169 R1C4.2@74,52.5 ; R1C6.2@89.2,52.5 87.884,53.816 87.884,55.804 91.161,59.08 91.161,71.882 93.624,74.346 100.965,74.346 102.616,72.695 102.616,54.284 R1C8.2@104.4,52.5 ; R1C12.2@134.8,52.5 133.325,53.975 133.325,55.521 134.849,57.045 v1(134.849,63.043) ; R1C14.2@150,52.5 148.025,54.475 148.025,59.785 152.782,64.541 v1(155.004,64.541) ; R1C22.2@210.8,52.5 209.296,50.996 209.296,49.225 209.804,48.717 214.554,48.717 215.849,50.013 215.849,55.753 216.885,56.789 221.711,56.789 R1C24.2@226,52.5
  Bottom Layer w0.254: R1C4.2@74,52.5 72.719,53.781 72.719,55.88 73.12,56.281 77.216,56.281 78.41,55.087 78.41,51.185 80.876,48.719 84.695,48.719 84.985,49.009 85.709,49.009 R1C6.2@89.2,52.5 ; v1(134.849,63.043) 136.22,61.671 156.571,61.671 158.044,60.198 ; v1(155.004,64.541) 156.376,63.17 177.153,63.17 177.8,62.523 177.8,61.429 ; R1C18.2@180.4,52.5 178.347,54.553 178.347,58.928 177.077,60.198 176.569,60.198 ; R27.2@185.127,69.215 185.127,68.58 184.873,68.326 181.762,68.326 181,69.088 181,70.096 179.138,70.096 178.892,69.85 178.892,69.215 R26.2@178.347,69.215 178.347,61.976 177.8,61.429 ; 158.044,60.198 176.569,60.198 ; 158.044,60.198 176.569,60.198 ; 176.569,60.198 177.8,61.429 ; 176.569,60.198 177.8,61.429
NetR1C2_3: R1C2.3 R1C4.3 R1C6.3 R1C8.3 R1C10.3 R1C12.3 R1C14.3 R1C16.3 R1C18.3 R1C20.3 R1C22.3 R1C24.3 R1C26.3 R27.1 R28.2 | length 569.8
  MidLayer1 w0.254: R1C2.3@58.8,50 57.506,51.294 57.506,57.76 67.437,67.691 74.168,67.691 ; R1C4.3@74,50 72.669,51.331 72.669,66.192 74.168,67.691 ; v1(161.925,64.186) 160.071,66.04 v1(148.463,66.04) 147.218,64.795 133.731,64.795 v1(133.223,65.303) 130.835,67.691 ; R1C18.3@180.4,50 181.638,48.762 182.477,48.762 182.521,48.717 183.448,48.717 184.76,50.029 184.76,55.118 185.928,56.286 191.516,56.286 193.446,54.356 193.446,48.768 194.511,47.703 208.503,47.703 R1C22.3@210.8,50 213.099,47.701 223.701,47.701 R1C24.3@226,50 227.283,48.717 229.296,48.717 232.319,51.74 232.319,55.936 232.664,56.281 236.81,56.281 237.871,55.22 237.871,52.324 240.195,50 R1C26.3@241.2,50 ; 74.168,67.691 130.835,67.691 ; 74.168,67.691 130.835,67.691
  MidLayer2 w0.254: R1C6.3@89.2,50 90.481,48.719 92.456,48.719 93.457,49.72 93.457,67.889 98.72,73.152 101.219,73.152 101.651,72.72 101.651,52.749 R1C8.3@104.4,50 105.683,48.717 108.433,48.717 109.563,49.847 ; R1C10.3@119.6,50 118.317,48.717 110.693,48.717 109.563,49.847 ; R1C12.3@134.8,50 133.104,51.696 133.104,53.313 132.505,53.912 132.505,64.585 v1(133.223,65.303) 128.041,70.485 110.185,70.485 109.626,69.926 109.626,49.911 ; v1(148.463,66.04) 147.447,65.024 147.447,52.553 R1C14.3@150,50 ; v1(161.925,64.186) 161.925,53.275 R1C16.3@165.2,50 ; 109.563,49.847 109.626,49.911 ; 109.563,49.847 109.626,49.911
  Bottom Layer w0.254: v1(133.223,65.303) 133.223,62.992 135.128,61.087 156.108,61.087 157.556,59.639 173.279,59.639 177.216,55.702 177.216,54.381 179.119,52.478 179.119,51.281 R1C18.3@180.4,50 ; v1(161.925,64.186) 174.752,64.186 176.428,65.862 176.428,69.139 177.894,70.604 181.282,70.604 182.671,69.215 R27.1@183.427,69.215 183.427,69.85 183.681,70.104 189.953,70.104 190.207,69.85 R28.2@190.207,69.215 ; R1C20.3@195.6,50 196.881,48.719 198.757,48.719 201.32,51.283 201.32,55.423 202.184,56.286 206.985,56.286 207.696,55.575 207.696,53.104 R1C22.3@210.8,50
NetR1C2_4: R1C2.4 R1C4.4 R1C6.4 R1C8.4 R1C10.4 R1C12.4 R1C14.4 R1C16.4 R1C18.4 R1C20.4 R1C22.4 R1C24.4 R1C26.4 R30.1 R31.2 | length 355.5
  MidLayer1 w0.254: R1C4.4@76.5,55 76.5,56.126 76.268,56.358 76.268,57.912 ; v1(81.839,61.722) 80.078,61.722 77.411,59.055 ; v1(87.147,59.055) 77.411,59.055 ; R1C12.4@137.3,55 141.111,51.189 141.111,48.895 141.289,48.717 146.025,48.717 147.472,50.165 147.472,54.864 148.895,56.286 151.214,56.286 R1C14.4@152.5,55 ; R1C16.4@167.7,55 171.12,58.42 179.984,58.42 181.738,59.715 183.033,58.42 190.068,58.42 v1(192.888,61.239) 193.548,61.239 195.097,59.69 195.097,58.003 R1C20.4@198.1,55 ; R1C22.4@213.3,55 215.849,52.451 215.849,49.784 217.424,48.209 222.631,48.209 224.714,50.292 224.714,55.956 225.044,56.286 227.214,56.286 R1C24.4@228.5,55 230.289,56.789 241.911,56.789 R1C26.4@243.7,55 ; 76.268,57.912 77.411,59.055 ; 76.268,57.912 77.411,59.055
  MidLayer2 w0.254: R1C8.4@106.9,55 108.61,56.71 108.61,60.681 108.28,61.011 106.604,61.011 104.826,62.789 104.826,67.97 107.975,71.12 131.369,71.12 136.423,66.065 136.423,55.877 R1C12.4@137.3,55 ; R1C14.4@152.5,55 152.5,58.348 160.522,66.37 163.264,66.37 165.906,63.729 165.906,56.794 R1C16.4@167.7,55
  Bottom Layer w0.254: R1C2.4@61.3,55 64.11,57.81 74.134,57.81 78.046,61.722 v1(81.839,61.722) ; v1(87.147,59.055) 87.645,59.055 R1C6.4@91.7,55 93.997,57.297 104.603,57.297 R1C8.4@106.9,55 109.499,57.599 109.499,61.976 110.16,62.636 114.464,62.636 R1C10.4@122.1,55 ; R1C18.4@182.9,55 182.9,57.912 192.185,67.197 198.667,67.197 ; v1(192.888,61.239) 198.857,66.04 ; R30.1@198.667,69.215 198.667,67.197 ; R31.2@205.447,69.215 205.447,69.85 205.193,70.104 202.921,70.104 ; R1C22.4@213.3,55 201.103,67.197 201.103,68.287 ; 198.667,67.197 198.667,66.23 198.857,66.04 ; 198.857,66.04 201.103,68.287 ; 201.103,68.287 202.921,70.104 ; 201.103,68.287 202.921,70.104
NetR1C2_5: R1C2.5 R1C4.5 R1C6.5 R1C8.5 R1C10.5 R1C12.5 R1C14.5 R1C16.5 R1C18.5 R1C20.5 R1C22.5 R1C24.5 R1C26.5 R29.1 R30.2 | length 505.7
  Top Layer w0.254: v1(238.887,55.677) 238.887,57.633 v1(242.748,61.493)
  MidLayer1 w0.254: R1C4.5@76.5,52.5 81.023,57.023 95.003,57.023 ; R1C6.5@91.7,52.5 93.091,53.891 93.091,55.111 95.003,57.023 ; v1(106.692,63.551) 107.2,64.059 ; R1C12.5@137.3,52.5 137.3,51.562 137.579,51.283 137.998,51.283 141.072,48.209 152.73,48.209 153.797,49.276 153.797,51.203 R1C14.5@152.5,52.5 ; v1(167.869,61.976) 169.164,63.271 180.924,63.271 ; v1@184.201,61.544 v1@184.252,61.595 ; v1(184.201,61.646) v1@184.252,61.595 ; v1(242.748,61.493) 241.63,62.611 209.144,62.611 v1(209.042,62.509) 195.42,62.509 194.658,63.271 ; 95.003,57.023 102.039,64.059 ; 95.003,57.023 102.039,64.059 ; 102.039,64.059 106.692,64.059 107.2,64.059 ; 107.2,64.059 135.28,64.059 ; 107.2,64.059 135.28,64.059 ; 135.28,64.059 135.865,63.475 160.198,63.475 162.89,60.782 178.435,60.782 180.924,63.271 ; 180.924,63.271 185.928,63.271 ; 180.924,63.271 185.928,63.271 ; v1@184.252,61.595 185.928,63.271 ; v1@184.252,61.595 185.928,63.271 ; 185.928,63.271 194.658,63.271 ; 185.928,63.271 194.658,63.271 ; 185.928,63.271 194.658,63.271
  MidLayer2 w0.254: R1C2.5@61.3,52.5 62.586,51.214 62.586,49.38 64.668,47.297 70.687,47.297 71.195,47.805 76.355,47.805 77.8,49.251 77.8,51.2 R1C4.5@76.5,52.5 ; v1(106.692,63.551) 109.118,61.125 109.118,54.718 R1C8.5@106.9,52.5 ; R1C16.5@167.7,52.5 168.986,53.786 168.986,60.858 v1(167.869,61.976) ; R1C18.5@182.9,52.5 184.201,53.801 v1@184.201,61.544 ; R1C24.5@228.5,52.5 230.378,54.378 230.378,58.115 235.306,63.043 238.328,63.043 238.887,62.484 v1(238.887,55.677)
  Bottom Layer w0.254: v1(106.692,63.551) 114.91,63.551 116.637,61.824 118.008,61.824 123.952,55.88 123.952,54.352 R1C10.5@122.1,52.5 ; R1C14.5@152.5,52.5 156.283,48.717 161.392,48.717 162.687,50.013 162.687,54.229 163.932,55.474 163.932,55.621 164.592,56.281 168.656,56.281 168.986,55.951 168.986,53.786 R1C16.5@167.7,52.5 ; R1C18.5@182.9,52.5 185.293,54.893 185.293,56.896 186.309,57.912 190.246,57.912 192.557,60.223 193.675,60.223 195.58,62.128 197.307,62.128 198.476,60.96 198.476,56.436 199.39,55.522 199.39,53.79 R1C20.5@198.1,52.5 ; v1(184.201,61.646) 190.373,67.818 194.564,67.818 195.287,68.541 R29.1@195.287,69.215 195.287,73.152 195.582,73.447 200.162,73.447 200.367,73.242 R30.2@200.367,69.215 ; v1(209.042,62.509) 209.042,61.849 214.605,56.286 214.605,53.805 R1C22.5@213.3,52.5 ; v1(238.887,55.677) 239.497,56.286 244.348,56.286 244.983,55.651 244.983,53.783 R1C26.5@243.7,52.5
NetR1C2_6: R1C2.6 R1C4.6 R1C6.6 R1C8.6 R1C10.6 R1C12.6 R1C14.6 R1C16.6 R1C18.6 R1C20.6 R1C22.6 R1C24.6 R1C26.6 R28.1 R29.2 | length 389.4
  MidLayer1 w0.254: R1C2.6@61.3,50 63.856,52.556 63.856,55.118 65.024,56.286 69.672,56.286 72.161,53.797 72.161,49.555 73,48.717 75.217,48.717 R1C4.6@76.5,50 ; R1C16.6@167.7,50 170.993,53.293 170.993,56.388 171.501,56.896 180.213,56.896 v1(181.508,58.191) ; v1(185.217,65.583) 194.152,65.583 196.184,63.551 v1(207.67,63.551) v1(243.256,63.551)
  MidLayer2 w0.254: R1C10.6@122.1,50 125.4,46.7 125.4,29.616 126.313,28.704 130.659,28.704 131.097,29.141 131.097,34.899 133.299,37.102 133.299,45.999 R1C12.6@137.3,50 ; v1(181.508,58.191) 181.508,63.602 183.49,65.583 v1(185.217,65.583) 185.217,60.198 184.836,59.817 184.836,51.936 R1C18.6@182.9,50 ; R1C20.6@198.1,50 196.817,48.717 194.878,48.717 194.319,49.276 194.319,55.531 195.428,56.639 195.428,60.198 198.78,63.551 v1(207.67,63.551) ; v1(243.256,63.551) 244.981,61.826 244.981,51.281 R1C26.6@243.7,50
  Bottom Layer w0.254: R1C4.6@76.5,50 78.289,48.211 85.203,48.211 85.493,48.501 90.201,48.501 R1C6.6@91.7,50 93.65,51.95 93.65,55.027 95.412,56.789 100.688,56.789 101.089,56.388 101.089,50.858 103.419,48.528 105.428,48.528 R1C8.6@106.9,50 110.49,53.59 110.49,60.96 111.658,62.128 114.021,62.128 117.805,58.344 117.805,49.983 119.069,48.719 120.819,48.719 R1C10.6@122.1,50 ; R1C12.6@137.3,50 139.597,47.703 150.203,47.703 R1C14.6@152.5,50 154.799,47.701 165.401,47.701 R1C16.6@167.7,50 ; R28.1@188.507,69.215 188.507,68.58 188.281,68.326 ; R29.2@193.587,69.215 193.587,68.58 193.333,68.326 188.281,68.326 ; v1(207.67,63.551) 209.559,63.551 210.118,62.992 210.118,61.611 215.113,56.617 215.113,51.813 R1C22.6@213.3,50 ; R1C24.6@228.5,50 229.783,48.717 242.417,48.717 R1C26.6@243.7,50 ; 188.281,68.326 187.96,68.326 v1(185.217,65.583) 185.838,65.583 188.281,68.326
NetR2C1_1: R2C1.1 R2C3.1 R2C5.1 R2C7.1 R2C9.1 R2C11.1 R2C13.1 R2C15.1 R2C17.1 R2C19.1 R2C21.1 R2C23.1 R2C25.1 R2C27.1 R7.1 R8.1 | length 453.4
  Top Layer w0.254: v1@175.146,47.346 175.304,47.504 175.984,48.184 176.143,48.025 ; v1(175.463,47.346) 176.143,48.025 ; v1(196.952,69.063) 196.952,60.579 194.564,58.191 193.091,58.191 193.04,58.242 187.223,58.242 185.369,56.388 185.369,49.657 183.896,48.184 176.301,48.184 ; 176.143,48.025 176.301,48.184 ; 176.143,48.025 176.301,48.184
  MidLayer1 w0.254: R2C7.1@96.8,45 97.596,45.796 98.019,45.796 98.503,46.281 100.274,46.281 100.581,45.974 100.581,42.007 103.869,38.719 107.782,38.719 108.763,39.7 108.763,42.672 111.091,45 R2C9.1@112,45 ; v1(124.308,46.304) 125.612,45 R2C11.1@127.2,45 ; v1(196.952,69.063) 200.05,65.964 249.733,65.964 v1(252.603,63.094)
  MidLayer2 w0.254: R2C1.1@51.2,45 49.174,47.026 49.174,58.572 54.458,63.856 v1(81.827,63.856) ; R2C9.1@112,45 113.56,46.56 115.289,46.56 116.154,45.695 118.313,45.695 118.923,46.304 v1(124.308,46.304) ; R2C17.1@172.8,45 v1@175.146,47.346 ; R2C19.1@188,45 189.304,46.304 191.008,46.304 192.345,44.967 ; v1(196.952,69.063) 194.92,67.031 194.92,57.147 193.811,56.039 193.811,49.193 192.345,47.727 192.345,44.967 ; R2C21.1@203.2,45 199.889,41.689 199.889,38.888 199.212,38.211 193.334,38.211 192.345,39.2 ; R2C23.1@218.4,45 220.187,46.787 231.813,46.787 R2C25.1@233.6,45 ; R2C27.1@248.8,45 252.603,48.803 v1(252.603,63.094) ; v1(81.827,63.856) v1(88.607,63.856) v1(81.827,63.856) ; 192.345,39.2 192.345,44.967 ; 192.345,39.2 192.345,44.967
  Bottom Layer w0.254: R2C1.1@51.2,45 53.497,47.297 68.697,47.297 ; R2C3.1@66.4,45 68.697,47.297 ; v1(81.827,63.856) R7.1@81.827,69.215 ; v1(88.607,63.856) R8.1@88.607,69.215 ; R2C7.1@96.8,45 94.503,47.297 86.792,47.297 86.18,46.685 83.285,46.685 R2C5.1@81.6,45 79.811,46.789 76.205,46.789 75.697,47.297 ; v1(124.308,46.304) 125.324,47.32 138.796,47.32 141.117,45 R2C13.1@142.4,45 144.189,46.789 155.811,46.789 R2C15.1@157.6,45 159.666,47.066 175.184,47.066 v1(175.463,47.346) ; R2C25.1@233.6,45 234.904,46.304 236.804,46.304 237.388,45.72 237.388,41.615 240.284,38.719 244.602,38.719 245.489,39.606 245.489,41.689 R2C27.1@248.8,45 ; 68.697,47.297 75.697,47.297 ; 68.697,47.297 75.697,47.297
NetR2C1_2: R2C1.2 R2C3.2 R2C5.2 R2C7.2 R2C9.2 R2C11.2 R2C13.2 R2C15.2 R2C17.2 R2C19.2 R2C21.2 R2C23.2 R2C25.2 R2C27.2 R8.2 R9.2 | length 663.5
  Top Layer w0.254: v1(169.824,65.253) 169.824,39.776 v1(170.993,38.608) ; v1(230.81,42.494) 230.81,66.04 232.842,68.072 ; v1@247.498,61.697 241.122,68.072 ; v1(247.675,61.874) 241.478,68.072 241.122,68.072 ; 232.842,68.072 241.122,68.072 ; 232.842,68.072 241.122,68.072
  MidLayer1 w0.254: v1(88.685,71.628) v1(95.211,71.628) ; R2C13.2@142.4,42.5 141.119,43.781 141.119,45.72 141.68,46.281 153.819,46.281 v1(154.965,45.135) ; R2C21.2@203.2,42.5 201.905,43.795 201.905,45.796 202.54,46.431 206.273,46.431 209.22,43.485 209.22,39.37 210.312,38.278 214.178,38.278 R2C23.2@218.4,42.5 ; v1(247.675,61.874) 244.297,65.253 196.494,65.253 194.64,67.107 182.677,67.107 180.823,65.253 v1(169.824,65.253) 165.786,69.291 119.075,69.291 117.577,70.79 99.914,70.79 99.076,71.628 ; v1(95.211,71.628) 99.076,71.628 ; v1(95.211,71.628) 99.076,71.628
  MidLayer2 w0.254: R2C7.2@96.8,42.5 95.504,41.204 95.504,39.218 96.012,38.71 100.067,38.71 102.281,40.924 102.281,45.868 103.226,46.812 108.255,46.812 111.354,43.713 111.721,43.713 112,43.434 R2C9.2@112,42.5 ; v1(154.965,45.135) 156.694,46.863 160.249,46.863 161.392,45.72 161.392,44.501 163.398,42.494 163.398,38.389 163.712,38.075 170.459,38.075 v1(170.993,38.608) ; R2C19.2@188,42.5 186.719,41.219 186.719,39.443 188.459,37.703 ; R2C21.2@203.2,42.5 200.397,39.697 200.397,38.391 199.709,37.703 ; v1(230.81,42.494) 230.81,41.662 ; R2C25.2@233.6,42.5 231.648,42.5 231.226,42.078 230.81,41.662 ; v1@247.498,61.697 247.498,43.802 R2C27.2@248.8,42.5 ; 188.459,37.703 199.709,37.703 ; 188.459,37.703 199.709,37.703 ; 199.709,37.703 214.036,37.703 214.554,37.186 223.152,37.186 224.054,38.087 228.714,38.087 230.81,40.183 ; 230.81,40.183 230.81,41.662 ; 230.81,40.183 230.81,41.662
  Bottom Layer w0.254: R8.2@86.907,69.215 86.907,69.85 v1(88.685,71.628) ; R9.2@93.687,69.215 93.687,70.104 v1(95.211,71.628) 91.122,75.717 47.219,75.717 44.856,73.355 44.856,54.339 51.308,47.887 51.308,46.769 50.919,46.38 50.369,46.38 49.784,45.796 49.784,43.916 R2C1.2@51.2,42.5 49.911,41.211 49.911,39.116 50.724,38.303 55.88,38.303 57.023,39.446 57.023,45.72 57.584,46.281 62.619,46.281 R2C3.2@66.4,42.5 65.1,41.2 65.1,39.116 65.71,38.506 69.367,38.506 70.485,39.624 70.485,44.502 72.772,46.789 75.189,46.789 75.697,46.281 77.819,46.281 R2C5.2@81.6,42.5 80.315,41.215 80.315,39.116 80.721,38.71 84.658,38.71 87.411,41.462 87.411,46.228 87.972,46.789 92.511,46.789 R2C7.2@96.8,42.5 ; R2C11.2@127.2,42.5 125.908,43.792 125.908,45.542 127.178,46.812 138.088,46.812 R2C13.2@142.4,42.5 ; v1(154.965,45.135) R2C15.2@157.6,42.5 ; v1(170.993,38.608) 170.993,40.693 R2C17.2@172.8,42.5 ; 231.648,42.5 R2C25.2@233.6,42.5
NetR2C1_3: R2C1.3 R2C3.3 R2C5.3 R2C7.3 R2C9.3 R2C11.3 R2C13.3 R2C15.3 R2C17.3 R2C19.3 R2C21.3 R2C23.3 R2C25.3 R2C27.3 R9.1 R10.1 | length 543.4
  Top Layer w0.254: v1(106.07,58.928) 108.814,56.185 108.814,43.002 v1(109.779,42.037) ; v1(164.617,78.511) 171.399,78.511 173.457,76.454 173.457,69.494 v1(171.628,67.666) ; v1(231.267,39.065) 231.851,39.649 231.851,65.329 v1(233.553,67.031)
  MidLayer1 w0.254: R2C1.3@51.2,40 53.497,37.703 64.103,37.703 R2C3.3@66.4,40 68.706,37.694 77.957,37.694 78.645,38.382 83.218,38.382 ; R2C5.3@81.6,40 83.218,38.382 ; v1(106.121,72.136) 116.992,72.136 119.278,69.85 169.443,69.85 v1(171.628,67.666) 171.628,69.85 195.174,69.85 195.91,70.587 202.438,70.587 205.867,67.158 222.783,67.158 223.749,68.123 232.461,68.123 v1(233.553,67.031) ; v1(109.474,37.516) 99.284,37.516 R2C7.3@96.8,40 94.824,38.024 87.702,38.024 87.344,38.382 ; R2C21.3@203.2,40 205.532,37.668 213.995,37.668 214.478,37.186 216.459,37.186 216.865,37.592 216.865,38.465 R2C23.3@218.4,40 220.706,37.694 231.294,37.694 R2C25.3@233.6,40 231.694,40 v1@231.267,39.573 ; 83.218,38.382 87.344,38.382 ; 83.218,38.382 87.344,38.382
  MidLayer2 w0.254: v1(109.474,37.516) 109.516,37.516 R2C9.3@112,40 ; R2C13.3@142.4,40 141.119,41.281 141.119,74.393 142.875,76.149 148.971,76.149 153.035,72.085 158.191,72.085 v1(164.617,78.511) ; v1(162.382,41.275) 162.382,38.608 163.424,37.567 171.552,37.567 172.8,38.815 R2C17.3@172.8,40 171.501,41.299 171.501,47.879 172.339,48.717 176.047,48.717 176.606,49.276 176.606,56.286 171.628,61.265 v1(171.628,67.666) ; R2C25.3@233.6,40 236.354,37.247 236.728,37.247 237.889,36.085 237.889,29.446 239.497,27.838 244.935,27.838 245.545,28.448 245.545,32.817 247.011,34.283 247.011,38.211 R2C27.3@248.8,40
  Bottom Layer w0.254: R9.1@91.987,69.215 92.876,68.326 94.463,68.326 ; v1(106.07,58.928) 98.767,66.231 R10.1@98.767,69.215 97.878,68.326 94.463,68.326 ; v1(106.121,72.136) 105.105,73.152 97.257,73.152 96.241,72.136 96.241,70.104 94.463,68.326 ; v1(109.474,37.516) 109.626,37.668 118.008,37.668 118.999,36.678 123.878,36.678 R2C11.3@127.2,40 ; v1(109.779,42.037) 111.125,40.691 111.125,40 R2C9.3@112,40 ; R2C15.3@157.6,40 158.89,38.71 161.036,38.71 162.382,40.056 v1(162.382,41.275) ; R2C17.3@172.8,40 175.794,37.006 185.006,37.006 R2C19.3@188,40 ; v1(231.267,39.065) v1@231.267,39.573